# Altium PCB STM32F0 Bigger.PcbDoc
Units mil, origin at the board's own origin, x right, y up, seen from the top; angles counter-clockwise.
Board outline 1940 x 1530 mil, 2 copper layers (Top Layer, Bottom Layer); 25 components, 27 nets, 140 pads, 0 vias.
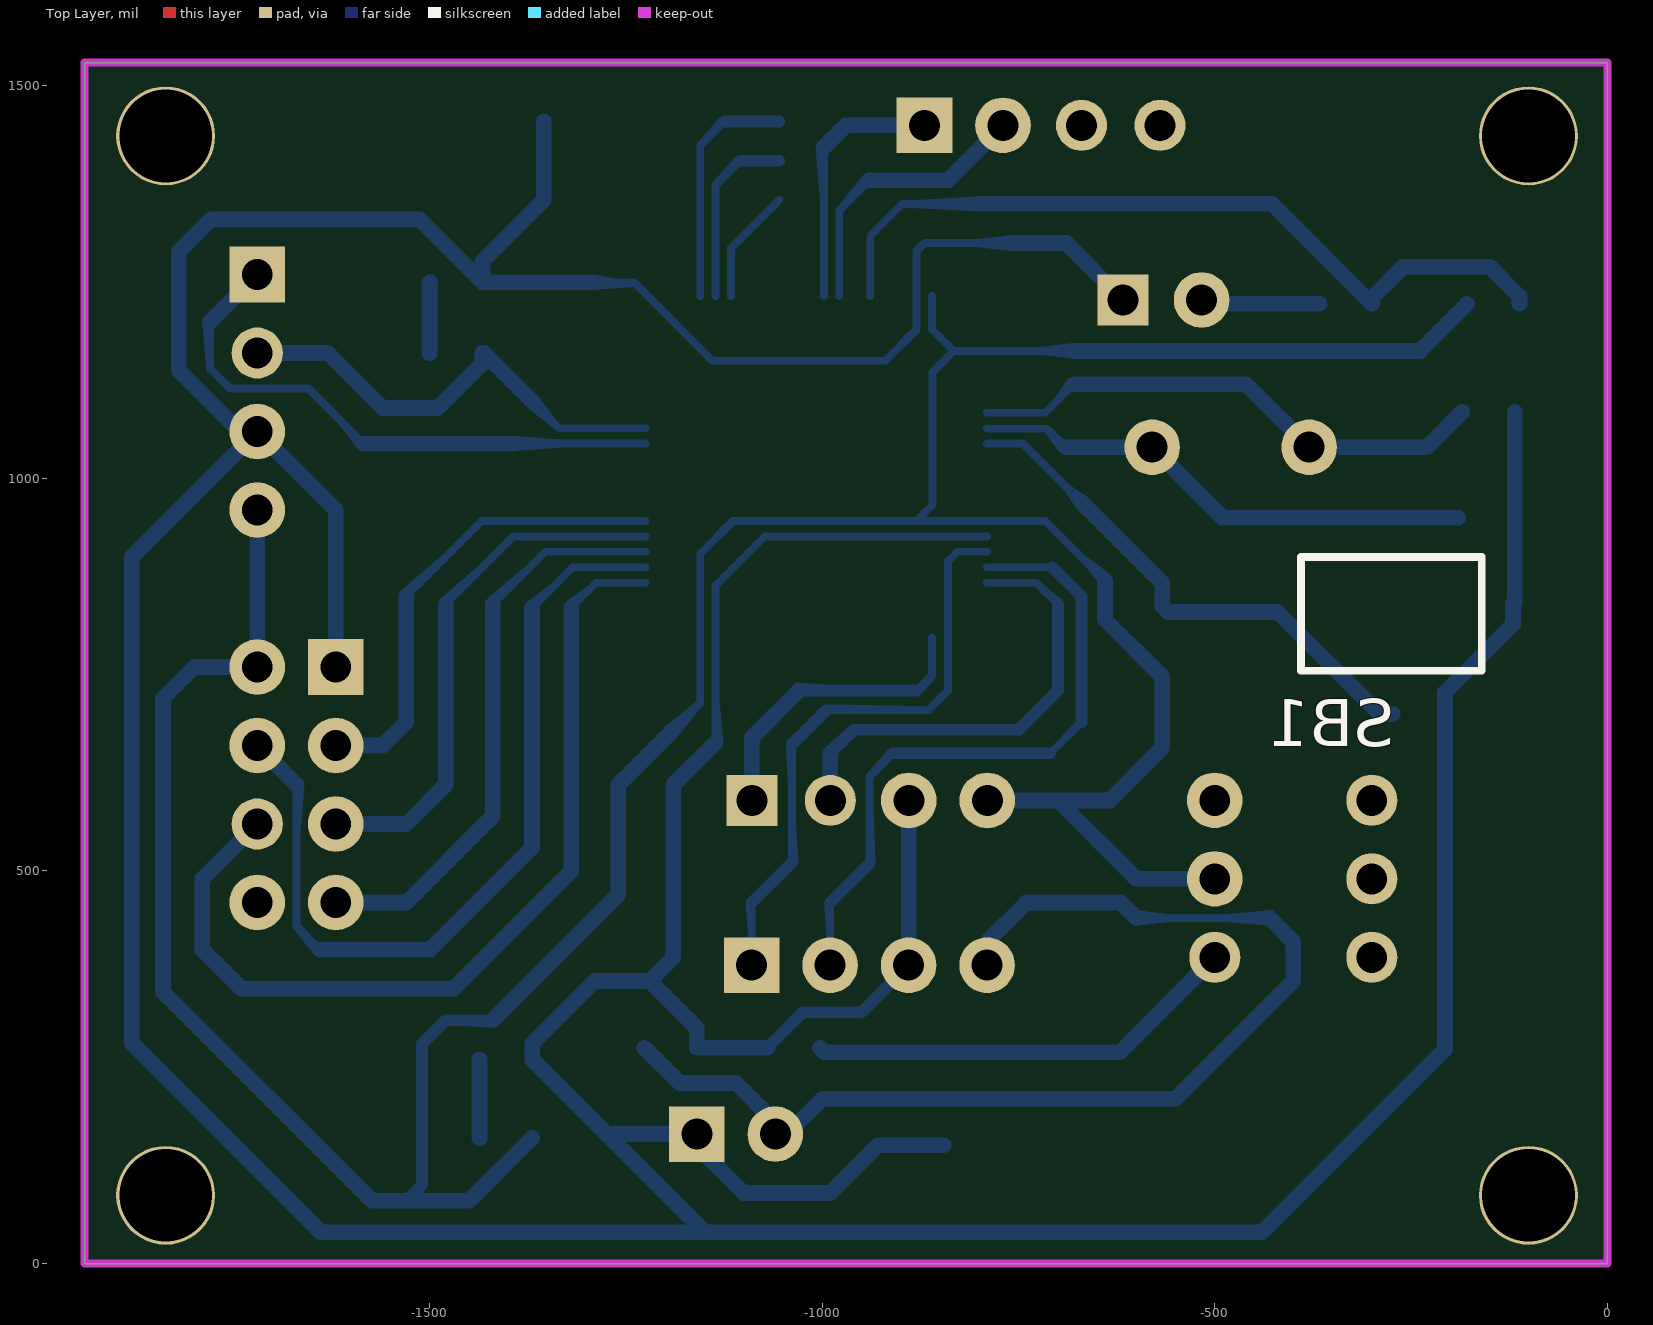
[diagram p0: Top Layer view]
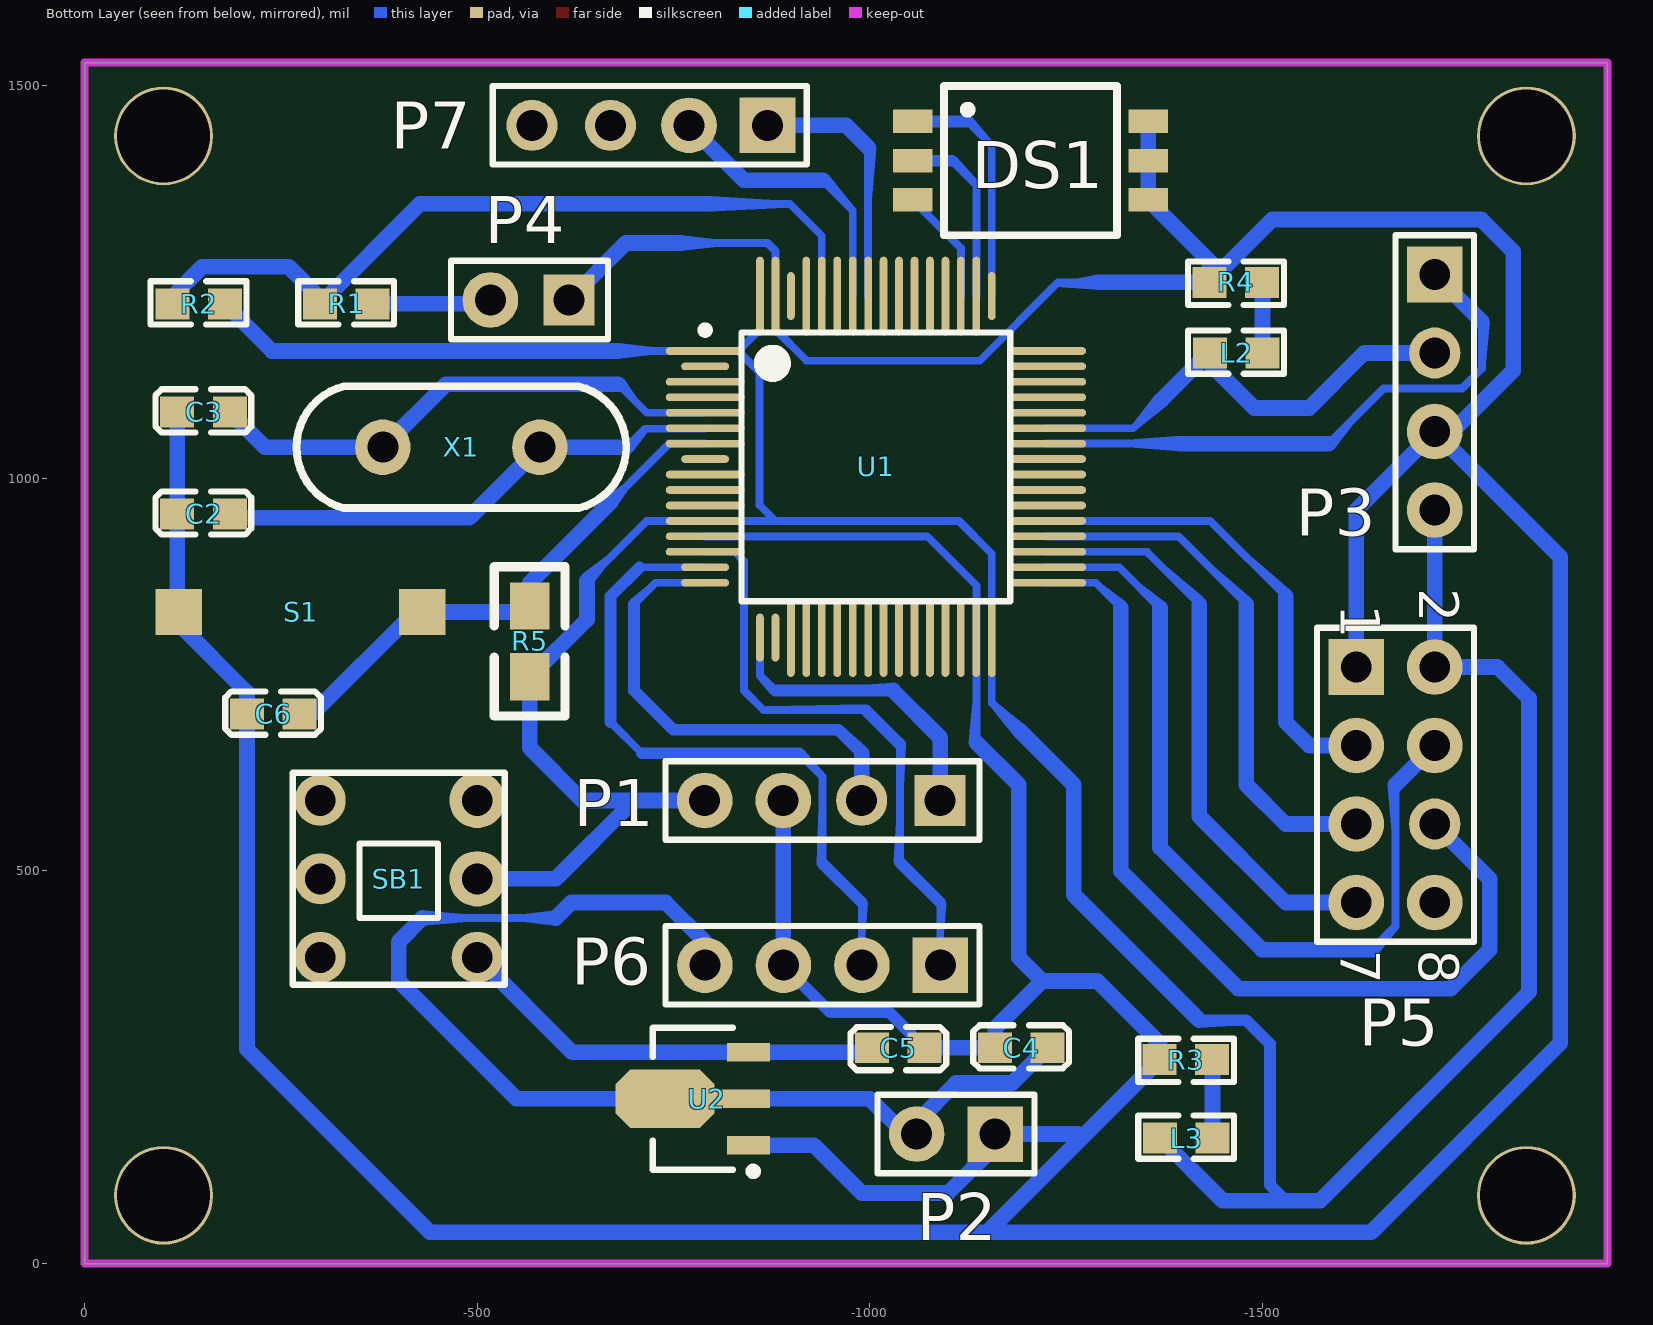
[diagram p1: Bottom Layer view, seen from below]

## Layer stack, top to bottom
Top Solder: solder mask 0.4, Solder Resist, Dk 3.5
Top Layer: signal copper 1.4
Dielectric 1: dielectric 12.6, FR-4, Dk 4.8
Bottom Layer: signal copper 1.4
Bottom Solder: solder mask 0.4, Solder Resist, Dk 3.5

## Board outline
-1939.77,-0.15 0.23,-0.15 0.23,1529.86 -1939.77,1529.86

## Design rules (kind name [scope] priority, off if disabled: settings)
Clearance [All] p1: gap=7.84
PolygonConnect [All] p1: connectstyle=Relief reliefconductorwidth=10 reliefentries=4 polygonreliefangle="90 Angle" airgapwidth=10
RoomDefinition STM32F0 [InComponentClass('STM32F0')] p1: confinementstyle=ConfineIn formatcopy=TRUE lockcomponents=FALSE outline -1939.77,2.41 -1.78,2.41 -1.78,1529.85 -1939.77,1529.85
RoutingLayers [All] p1: top layer_v5=FALSE bottom layer_v5=TRUE
RoutingVias [All] p1: holewidth=23.62 width=39.37 viastyle="Through Hole" minholewidth=28 minwidth=50 maxholewidth=28 maxwidth=50
SolderMaskExpansion [All] p1: expansion=4
Width [All] p1: maxlimit=20 minlimit=10 preferedwidth=20
28 further rules are at their usual default settings.

## Components (designator, comment, footprint, x,y, rotation, side; value= is the part's Value field where it differs from the comment)
C2 "6.8pF" CAP-0603 -117.85,954.85 r180 bottom
C3 "6.8pF" CAP-0603 -117.85,1084.85 r180 bottom
C4 "10uF" CAP-0603 -1159.77,274.85 r180 bottom
C5 "10uF" CAP-0603 -1069.77,274.85 r0 bottom
C6 "100pF" CAP-0603 -206.78,700 r180 bottom
DS1 "Dial Switch" DS-P3 -1209.77,1399.85 r90 bottom
L2 "LED" RES-0603 -1433.32,1159.85 r180 bottom
L3 "LED" RES-0603 -1369.77,159.85 r180 bottom
P1 "Header 4" HDR1X4#1 -1089.77,589.85 r0 bottom
P2 "Header 2" HDR1X2#1 -1159.77,164.85 r0 bottom
P3 "Header 4" HDR1X4#2 -1719.77,1259.85 r270 bottom
P4 "Header 2" HDR1X2#2 -616.78,1227.41 r0 bottom
P5 "Header 4X2" HDR2X4 -1619.77,759.85 r270 bottom
P6 "Header 4" HDR1X4#3 -1090,380 r0 bottom
P7 "Header 4" HDR1X4#4 -869.77,1449.85 r0 bottom
R1 "510" RES-0603 -299.77,1222.41 r180 bottom
R2 "10K" RES-0603 -111.78,1222.41 r180 bottom
R3 "1K" RES-0603 -1436.23,259.85 r0 bottom
R4 "1K" RES-0603 -1499.77,1249.85 r0 bottom
R5 "100K" 0805 -566.78,837.41 r270 bottom
S1 "SW-SPST" CP-SW -430,830 r180 bottom
SB1 "Self-lock Switch" 自锁开关6 -300,590 r90 bottom
U1 "STM32F051R8" LQFP64_L -1007.85,1014.85 r180 bottom
U2 "HT7333" SOT89N -774.77,209.85 r0 bottom
X1 "XTAL" 晶振-1 -379.77,1039.85 r180 bottom

## Footprints (in the part's own frame and the unit in brackets; to place one, negate y for a bottom-side part, rotate by r counter-clockwise, add the part's x,y. Pads: shape width x height; smd on the part's side, far side on the other; paste and mask are expansions set on the pad)
0805 [mil] "1/8W"
  rect 60x50 smd: 1(0,0) 2(90,0)
  silkscreen extent -50,-45 140,45
CAP-0603 [mm]
  rect 1.1x1 smd: 1(0,0) 2(1.7,0)
  silkscreen extent -0.71,-0.67 2.39,0.73
CP-SW [mm]
  rect 1.5x1.5 smd: 1(0,0) 2(-7.874,0)
DS-P3 [mil]
  rect 29.92x50 smd: 1(55,155) 2(5,155) 3(-45,155) 4(55,-145) 5(5,-145) 6(-45,-145)
  silkscreen extent -90,-105 100,115
HDR1X2#1 [mm] "Connector; Header; 2 Position"
  rect 1.8x1.8 hole 1: 1(0,0)
  round 1.8 hole 1: 2(2.54,0)
  silkscreen extent -1.27,-1.27 3.81,1.27
HDR1X2#2 [mm] "Connector; Header; 2 Position"
  rect 1.651x1.651 hole 1: 1(0,0)
  round 1.8 hole 1: 2(2.54,0)
  silkscreen extent -1.27,-1.27 3.81,1.27
HDR1X4#1 [mm] "Connector; Header; 4 Position"
  rect 1.651x1.651 hole 1: 1(0,0)
  round 1.651 hole 1: 2(2.54,0)
  round 1.8 hole 1: 3(5.08,0) 4(7.62,0)
  silkscreen extent -1.27,-1.27 8.89,1.27
HDR1X4#2 [mm] "Connector; Header; 4 Position"
  rect 1.8x1.8 hole 1: 1(0,0)
  round 1.651 hole 1: 2(2.54,0)
  round 1.8 hole 1: 3(5.08,0) 4(7.62,0)
  silkscreen extent -1.27,-1.27 8.89,1.27
HDR1X4#3 [mm] "Connector; Header; 4 Position"
  rect 1.8x1.8 hole 1: 1(0,0)
  round 1.8 hole 1: 2(2.54,0) 3(5.08,0) 4(7.62,0)
  silkscreen extent -1.27,-1.27 8.89,1.27
HDR1X4#4 [mm] "Connector; Header; 4 Position"
  rect 1.8x1.8 hole 1: 1(0,0)
  round 1.8 hole 1: 2(2.54,0)
  round 1.651 hole 1: 3(5.08,0) 4(7.62,0)
  silkscreen extent -1.27,-1.27 8.89,1.27
HDR2X4 [mm] "Connector; Header; 4x2 Position"
  rect 1.8x1.8 hole 1: 1(0,0)
  round 1.8 hole 1: 2(0,2.54) 3(2.54,0) 4(2.54,2.54) 5(5.08,0) 7(7.62,0) 8(7.62,2.54)
  round 1.651 hole 1: 6(5.08,2.54)
  silkscreen extent -1.27,-1.27 8.89,3.81
LQFP64_L [mm] "Thin QFP, 64-Leads, Body 10x10mm, Pitch 0.5mm, IPC High Density"
  oval 2.55x0.25 smd: 1(-5.525,3.75) 3(-5.525,2.75) 4(-5.525,2.25) 5(-5.525,1.75) 6(-5.525,1.25) 7(-5.525,0.75) 9(-5.525,-0.25) 10(-5.525,-0.75) 11(-5.525,-1.25) 12(-5.525,-1.75) 13(-5.525,-2.25) 14(-5.525,-2.75) 33(5.525,-3.75) 34(5.525,-3.25) 35(5.525,-2.75) 36(5.525,-2.25) 37(5.525,-1.75) 38(5.525,-1.25) 39(5.525,-0.75) 40(5.525,-0.25) 41(5.525,0.25) 42(5.525,0.75) 43(5.525,1.25) 44(5.525,1.75) 45(5.525,2.25) 46(5.525,2.75) 47(5.525,3.25) 48(5.525,3.75)
  oval 1.55x0.25 smd: 2(-5.525,3.25) 8(-5.525,0.25) 15(-5.525,-3.25) 16(-5.525,-3.75)
  oval 0.25x1.55 smd: 17(-3.75,-5.525) 18(-3.25,-5.525) 49(3.75,5.525) 62(-2.75,5.525)
  oval 0.25x2.55 smd: 19(-2.75,-5.525) 20(-2.25,-5.525) 21(-1.75,-5.525) 22(-1.25,-5.525) 23(-0.75,-5.525) 24(-0.25,-5.525) 25(0.25,-5.525) 26(0.75,-5.525) 27(1.25,-5.525) 28(1.75,-5.525) 29(2.25,-5.525) 30(2.75,-5.525) 31(3.25,-5.525) 32(3.75,-5.525) 50(3.25,5.525) 51(2.75,5.525) 52(2.25,5.525) 53(1.75,5.525) 54(1.25,5.525) 55(0.75,5.525) 56(0.25,5.525) 57(-0.25,5.525) 58(-0.75,5.525) 59(-1.25,5.525) 60(-1.75,5.525) 61(-2.25,5.525) 63(-3.25,5.525) 64(-3.75,5.525)
  silkscreen extent -5.65,-4.35 4.35,4.55, body extent -5,-5 5,5, height 1.6
RES-0603 [mm] "1/10W"
  rect 1.1x1 smd: 1(0,0) 2(1.7,0)
  silkscreen extent -0.71,-0.67 2.39,0.73
SOT89N [mm] "SOT89, 3-Leads, Body 4.5x2.4 mm, Pitch 1.5mm, Lead Span 4.1mm, IPC Medium Density"
  rect 1.4x0.6 smd: 1(-1.8,1.5) 3(-1.8,-1.5)
  rect 1.8x0.6 smd: 2(-1.6,0)
  oct 3.2x1.9 smd: 2(0.9,0)
  silkscreen extent -2.07,-2.3 1.3,2.47, body extent -1.3,-2.3 1.3,2.3, height 1.6
晶振-1 [mm] "5.08MM"
  round 1.8 hole 1: 1(0,0) 2(5.08,0)
  silkscreen extent -2.79,-1.97 7.87,1.97
自锁开关6 [mm] "自锁开关6.6X6.6"
  round 1.651 hole 1: 1(0,0) 2(-2.54,0) 3(-5.08,0) 4(-5.08,-5.08)
  round 1.8 hole 1: 5(-2.54,-5.08) 6(0,-5.08)
  silkscreen extent -5.97,-5.97 0.89,0.89

## Part data
C2 C3 C4 C5 C6: library part Cap, "Capacitor"
DS1: library part DS
L2 L3: "LED发光管"
P1 P3 P6 P7: "Header, 4-Pin"
P2 P4: "Header, 2-Pin"
P5: "Header, 4-Pin, Dual row"
R1 R2 R3 R4 R5: library part R, "电阻"
S1: "Single-Pole, Single-Throw Switch"
SB1: library part 自锁开关
U1: library part STM32F051R8T6
U2: library part HT7530-1, "3.0V 100mA Low Power,  Low Dropout Voltage (LDO) Regulator"
X1: "Crystal Oscillator"

## Free pads (board coordinates)
  round 125.98 hole 118.11: 0(-1836.47,86.83) 0(-1836.47,1436.38) 1(-100.44,86.83) 2(-100.44,1436.38)

## Nets (pads, with @x,y where several pads share a name; then routed paths per layer and width w, separated by ;. In a path a pad name is that pad's centre, name@x,y a point inside that pad or via, vN(x,y) a via of type N, cw(c..) or ccw(c..) an arc to the next point about the centre after c; other vN are vias at no path point)
GND: C2.1 C3.1 C4.1 C5.1 C6.1 DS1.4 DS1.5 DS1.6 P1.3 P2.1 P3.3 P4.1 P5.1 P6.3 R3.2 R4.2 S1.2 U1.13 U1.31 U1.63 U2.1 | length 8419.6
  Bottom Layer w10: -1289.77,1249.85 -1239.85,1249.85 -1140,1150 -919.63,1150 -879.89,1189.73 U1.63 -879.89,1289.74 -869.77,1299.85 -759.77,1299.85 ; -1135.8,663.83 U1.31 -1135.8,863.83 -1073.36,926.27 U1.13
  Bottom Layer w15: C5.1 -1024.63,320 -950,320 P6.3
  Bottom Layer w20: P5.1 -1619.77,959.85 P3.3 ; DS1.4 DS1.5 DS1.6 -1432.85,1276.78 R4.2 ; -1289.77,1249.85 R4.2 ; -1135.8,663.83 -1189.77,609.85 -1189.77,389.85 -1219.77,359.85 ; C5.1 C4.1 -1159.77,299.85 -1219.77,359.85 ; P6.3 -889.77,380.23 P1.3 ; U2.1 -928.83,150.8 -989.77,89.85 -1099.77,89.85 -1159.77,149.85 P2.1 -1265.23,164.85 -1270,160.08 ; -759.77,1299.85 -689.22,1299.85 P4.1 ; C3.1 C2.1 -117.85,842.15 -120,840 -120,814.2 -206.78,727.41 -206.78,272.85 -439.77,39.85 -1149.77,39.85 ; P3.3 -1742.08,1059.85 -1819.77,1137.55 -1819.77,1289.23 -1779.15,1329.85 -1512.85,1329.85 R4.2 ; P3.3 -1879.77,899.85 -1879.77,280.8 -1638.83,39.85 -1149.77,39.85 ; -1270,160.08 -1149.77,39.85 ; -1270,160.08 -1369.3,259.38 R3.2 -1369.3,280.33 -1289.77,359.85 -1219.77,359.85
NetC2_2: C2.2 U1.6 X1.2 | length 647.9
  Bottom Layer w10: U1.6 -789.67,1063.41 -713.33,1063.41 -689.77,1039.85
  Bottom Layer w20: -689.77,1039.85 X1.2 -489.77,949.85 C2.2@-189.77,949.85
NetC3_2: C3.2 U1.5 X1.1 | length 672.3
  Bottom Layer w10: U1.5 -715.88,1083.75 -679.77,1119.85
  Bottom Layer w20: -679.77,1119.85 -459.77,1119.85 X1.1 -229.77,1039.85 C3.2
NetC5_2: C5.2 SB1.4 U2.3 | length 555.5
  Bottom Layer w20: C5.2 -996.9,268.91 U2.3 -621.09,268.91 SB1.4
NetC6_2: C6.2 R5.1 S1.1 U1.7 | length 676.5
  Bottom Layer w10: U1.7 -744.3,1044.38 -669.77,969.85
  Bottom Layer w20: -669.77,969.85 -566.78,866.86 R5.1 -559.37,830 -420,830 -290,700 C6.2
NetDS1_1: DS1.1 U1.49 | length 305.2
  Bottom Layer w10: U1.49 -1155.48,1424.15 -1124.77,1454.85
  Bottom Layer w15: -1124.77,1454.85 DS1.1
NetDS1_2: DS1.2 U1.50 | length 235.3
  Bottom Layer w10: U1.50 -1135.8,1373.83 -1104.77,1404.85
  Bottom Layer w15: -1104.77,1404.85 DS1.2
NetDS1_3: DS1.3 U1.51 | length 147.9
  Bottom Layer w10: U1.51 -1116.11,1293.52 DS1.3
NetL2_1: L2.1 P3.2 U1.43 | length 600
  Bottom Layer w10: -1371.35,1099.85 -1335.56,1064.07 U1.43
  Bottom Layer w20: P3.2 -1629.77,1159.85 -1559.77,1089.85 -1489.77,1089.85 -1433.32,1146.31 L2.1 -1431.35,1159.85 -1371.35,1099.85
NetL2_2: L2.2 R4.1 | length 90.2
  Bottom Layer w20: L2.2 -1500.25,1249.38 R4.1
NetL3_2: L3.2 R3.1 | length 99.5
  Bottom Layer w20: L3.2 R3.1@-1436.7,259.38
NetP1_1: P1.1 U1.17 | length 357.9
  Bottom Layer w10: -879.77,729.85 -860.21,749.42 U1.17
  Bottom Layer w15: -1029.77,729.85 -879.77,729.85
  Bottom Layer w20: -1089.77,622.41 -1089.77,669.85 -1029.77,729.85
NetP1_2: P1.2 U1.16 | length 575
  Bottom Layer w10: U1.16 -727.14,867.22 -699.77,839.85
  Bottom Layer w15: -989.77,649.85 -959.77,679.85 -749.77,679.85 -699.77,729.85 -699.77,839.85
  Bottom Layer w20: P1.2@-989.77,609.85 -989.77,649.85
NetP3_1: P3.1 U1.42 | length 738.8
  Bottom Layer w10: -1779.77,1199.85 -1779.77,1139.85 -1754.43,1114.51 -1654.43,1114.51 -1584.3,1044.38 ; -1394.3,1044.38 U1.42
  Bottom Layer w20: -1779.77,1199.85 P3.1 ; -1584.3,1044.38 -1394.3,1044.38
NetP4_2: P4.2 R1.2 | length 152.1
  Bottom Layer w20: P4.2 -511.78,1222.41 R1.2
NetP5_3: P5.3 U1.37 | length 606.6
  Bottom Layer w10: -1529.77,849.85 -1433.67,945.96 U1.37
  Bottom Layer w20: P5.3 -1559.77,659.85 -1529.77,689.85 -1529.77,849.85
NetP5_4: P5.4 U1.34 | length 1098.1
  Bottom Layer w10: -1669.77,609.85 -1669.77,429.85 -1639.77,399.85 ; -1369.77,835.06 -1317.93,886.9 U1.34
  Bottom Layer w20: P5.4@-1729.77,659.85 P5.4 -1669.77,609.85 ; -1639.77,399.85 -1499.77,399.85 -1369.77,529.85 -1369.77,835.06
NetP5_5: P5.5 U1.36 | length 680.9
  Bottom Layer w10: -1479.77,839.85 -1393.36,926.27 U1.36
  Bottom Layer w20: P5.5 -1529.77,559.85 -1479.77,609.85 -1479.77,839.85
NetP5_6: P5.6 U1.33 | length 1185
  Bottom Layer w10: -1319.77,835.37 -1287.93,867.22 U1.33
  Bottom Layer w20: P5.6 -1789.77,489.85 -1789.77,399.85 -1739.77,349.85 -1469.77,349.85 -1319.77,499.85 -1319.77,835.37
NetP5_7: P5.7 U1.35 | length 737.6
  Bottom Layer w10: -1419.77,839.85 -1353.04,906.59 U1.35
  Bottom Layer w20: P5.7 -1529.77,459.85 -1419.77,569.85 -1419.77,839.85
NetP6_1: P6.1 U1.14 | length 749.1
  Bottom Layer w10: P6.1 -1089.77,380.23 -1089.77,459.85 ; -1038.41,511.22 -1038.41,661.59 ; -995.23,704.77 -864.86,704.77 -839.77,729.86 -839.77,894.74 -827.93,906.59 U1.14
  Bottom Layer w15: -1089.77,459.85 -1038.41,511.22 ; -1038.41,661.59 -995.23,704.77
NetP6_2: P6.2 U1.15 | length 855.6
  Bottom Layer w10: P6.2 -989.77,380.23 -989.77,459.85 ; -939.77,509.85 -939.77,619.85 -909.77,649.85 ; U1.15 -706.82,886.9 ; -709.77,649.85 -669.77,689.85
  Bottom Layer w15: -989.77,459.85 -939.77,509.85 ; -909.77,649.85 -709.77,649.85 ; -706.82,886.9 -669.77,849.85 -669.77,689.85
NetP7_1: P7.1 U1.57 | length 329.2
  Bottom Layer w10: U1.57 -998,1421.63
  Bottom Layer w20: -998,1421.63 -969.77,1449.85 P7.1
NetP7_2: P7.2 U1.58 | length 362.4
  Bottom Layer w10: U1.58 -978.32,1341.31 -939.77,1379.85
  Bottom Layer w20: -939.77,1379.85 -839.77,1379.85 P7.2
NetR1_1: R1.1 R2.1 U1.60 | length 1022.7
  Bottom Layer w10: U1.60 -938.95,1309.03 -898.12,1349.85 -789.77,1349.85
  Bottom Layer w20: -789.77,1349.85 -427.22,1349.85 R1.1 -299.77,1229.85 -259.77,1269.85 -149.77,1269.85 -111.78,1231.86 R2.1
VCC: L3.1 P1.4 P3.4 P5.2 R2.2 R5.2 SB1.5 U1.1 U1.12 U1.32 U1.64 | length 4634
  Bottom Layer w10: -1189.77,679.85 -1155.48,714.15 U1.32 -1155.48,904.15 -1113.67,945.96 -879.77,945.96 ; U1.64 -860.21,1190.29 U1.1@-832.41,1162.49 ; -679.77,1162.49 U1.1 U1.1@-832.41,1162.49 ; -639.77,869.85 -715.88,945.96 U1.12 -879.77,945.96 ; -879.77,945.96 -859.77,965.96 -859.77,1135.13 U1.1@-832.41,1162.49
  Bottom Layer w15: -1530,80 -1509.77,100.23 -1509.77,279.85 -1479.77,309.85 -1419.77,309.85
  Bottom Layer w20: P3.4 P5.2 -1799.77,759.85 -1839.77,719.85 -1839.77,345.98 -1573.65,79.85 -1449.77,79.85 L3.1 ; -1419.77,309.85 -1259.77,469.85 -1259.77,609.85 -1189.77,679.85 ; P1.4 -699.85,589.85 ; -679.77,1162.49 -238.63,1162.49 R2.2 ; -639.77,869.85 -639.77,820.41 R5.2 -566.78,656.86 -633.79,589.85 -699.85,589.85 ; SB1.5 -600,490 -699.85,589.85
VCC_IN: C4.2 P2.2 P6.4 U2.2 | length 1473.1
  Bottom Layer w10: -600,440 -430,440
  Bottom Layer w20: C4.2 -1181.7,229.85 -1109.85,229.85 -1059.77,179.77 P2.2 -1044.77,164.85 -999.77,209.85 -837.77,209.85 -739.34,209.85 -550.15,209.85 -400,360 -400,410 -430,440 ; P6.4 -790,409.85 -740,459.85 -619.85,459.85 -600,440
pads on no net: P5.8 P7.3 P7.4 SB1.1 SB1.2 SB1.3 SB1.6 U1.2 U1.3 U1.4 U1.8 U1.9 U1.10 U1.11 U1.18 U1.19 U1.20 U1.21 U1.22 U1.23 U1.24 U1.25 U1.26 U1.27 U1.28 U1.29 U1.30 U1.38 U1.39 U1.40 U1.41 U1.44 U1.45 U1.46 U1.47 U1.48 U1.52 U1.53 U1.54 U1.55 U1.56 U1.59 U1.61 U1.62

## Keep-outs
Keep-Out Layer:
  the board outline again, w10

## Other copper
Bottom Layer:
  region net NetP6_1: -995.01,712.2 -995.01,703.05 -994.93,702.97 -988.3,709.6 -867.95,709.6
  region net NetP6_2: -997.29,459.61 -989.88,459.61 -989.39,459.13 -994.52,454 -994.52,417.68
  region net NetP6_2: -932.69,508.42 -934.7,508.42 -941.28,515 -934.97,521.31 -934.97,582.03
  region net NetP6_2: -915.7,654.4 -915.08,654.4 -908.98,648.3 -934.84,622.44 -943.99,622.44
  region net NetP6_1: -1045.61,660.06 -1039.02,660.06 -1037.23,658.27 -1042.82,652.69 -1042.82,593.41
  region net NetP6_1: -1030.87,510.92 -1031.76,511.81 -1039.47,511.81 -1039.47,557.24 -1033.77,562.94
  region net NetP6_1: -1097.4,459.01 -1089.59,459.01 -1089.37,458.78 -1090.26,457.89 -1090.26,420.16 -1094.06,420.16 -1094.39,419.82
  region net NetDS1_2: -1110.84,1409.4 -1110.84,1407.45 -1107.55,1404.16 -1133.03,1378.68 -1138.17,1378.68
  region net NetDS1_1: -1130.36,1460.06 -1130.36,1457.9 -1125.84,1453.38 -1150.6,1428.62 -1157.59,1428.62
  region net NetP7_1: -1008.11,1421.59 -999.49,1421.59 -997.99,1420.08 -1002.64,1415.43 -1002.64,1354.85
  region net NetP7_2: -942.53,1376.36 -942.53,1382.18 -947.08,1386.73 -982.03,1343.59 -974.39,1344.5
  region net NetR1_1: -790.83,1339.52 -790.03,1340.32 -790.03,1359.94 -892.75,1353.73 -890.34,1352.73 -892.75,1354.53 -892.75,1344.92
  region net NetC3_2: -687.1,1126.32 -685.65,1118.9 -707.17,1097.37
  region net NetC2_2: -697.92,1034.04 -697.92,1034.22 -691.16,1040.98 -708.24,1058.05 -717.31,1059.48
  region net GND: -849.77,1299.85 -759.77,1309.85 -759.77,1289.85
  region net VCC: -765.74,1162.99 -682.18,1172.2 -682.01,1171.33 -679.41,1152.57
  region net NetC6_2: -662.31,976.1 -666.18,976.1 -677.81,964.47 -707.04,1007.12
  region net VCC: -634.46,878.33 -639.19,878.33 -649.39,868.13 -686.71,915.94 -683.7,915.8
  region net NetP1_2: -707.11,840.59 -701.53,840.59 -695.59,845.98 -726.33,871.19 -731.97,865.96
  region net NetP1_1: -873.74,725.24 -873.74,731.75 -879.09,737.1 -869.1,747.08 -855.73,747.08
  region net NetP1_1: -1030.01,739.78 -1030.01,726.41 -1028.39,724.79 -993.06,724.79 -993.06,737.11 -992.98,737.19
  region net NetP1_2: -995.78,657.51 -988.31,650.03 -984.99,650.03 -984.99,652.52 -957.1,680.41 -962.44,685.75 -964.34,685.75
  region net GND: -1125.89,663.39 -1128.33,663.39 -1138.24,673.29 -1137.52,674.01 -1137.52,707.46 -1135.37,707.46 -1130.92,711.91
  region net VCC: -1184.24,671.7 -1196.92,684.38 -1196.92,686.46 -1160.48,715.73 -1160.26,715.99 -1153.84,709.57 -1153.32,709.57
  region net NetP5_4: -1659.99,608.63 -1670.19,608.63 -1670.88,607.95 -1669.6,606.67 -1669.6,550.29 -1665.09,550.29 -1664.9,550.09
  region net NetP5_3: -1534.97,858.07 -1529.35,852.46 -1527.4,852.46 -1485.76,894.09 -1488.24,896.57 -1488.24,898.53
  region net NetP5_5: -1483.68,849.07 -1483.02,849.07 -1477.93,843.98 -1437.87,884.04 -1435.12,884.04 -1438.78,887.7
  region net NetP5_7: -1424.55,848.54 -1421.29,848.54 -1415.94,843.19 -1373.26,885.87 -1373.26,886.13 -1375.35,886.13 -1377.44,888.22
  region net NetP5_4: -1375.09,843.19 -1371.3,843.19 -1365.04,836.93 -1335.41,866.56 -1335.41,870.99 -1336.85,872.43
  region net NetP5_6: -1326.28,843.06 -1320.14,836.93 -1317.14,836.93 -1317.14,838.89 -1292.21,863.81 -1293.91,865.51 -1293.91,867.47
  region net NetP3_1: -1394.93,1054.47 -1394.93,1034.78 -1394.7,1034.89 -1328.37,1039.76 -1328.37,1049.13 -1328.85,1049.61
  region net NetL2_1: -1363.97,1106.68 -1376.54,1094.1 -1379.86,1094.1 -1340.47,1062.78 -1336.2,1067.05 -1336.2,1070.73
  region net GND: -1289.44,1259.46 -1289.44,1240.2 -1289.6,1240.51 -1226.91,1245.09 -1239.85,1249.85
  region net NetP3_1: -1789.77,1199.85 -1784.3,1140.68 -1779.77,1199.85
  region net VCC: -1419.96,300.08 -1419.96,306.99 -1424.27,302.67 -1464.6,302.67
  region net NetP3_1: -1591.52,1037.64 -1586.47,1039.37 -1615.45,1068.35
  region net NetP5_4: -1648.51,395.17 -1642.22,401.46 -1648.01,401.46 -1674.53,427.98
  region net VCC_IN: -430,450 -430,430 -540,440
  region net VCC_IN: -600,430 -600,450 -515,440 -520,440

## Text inside footprints (layer, text, board x,y; h text height)
P5: Bottom Overlay "8" at -1699.77,399.85 h50 r90; Bottom Overlay "7" at -1599.77,399.85 h50 r90; Bottom Overlay "1" at -1599.77,839.85 h50 r90; Bottom Overlay "2" at -1699.77,859.85 h50 r90